# EAGLE board FlashLightLED (EAGLE 5.10)
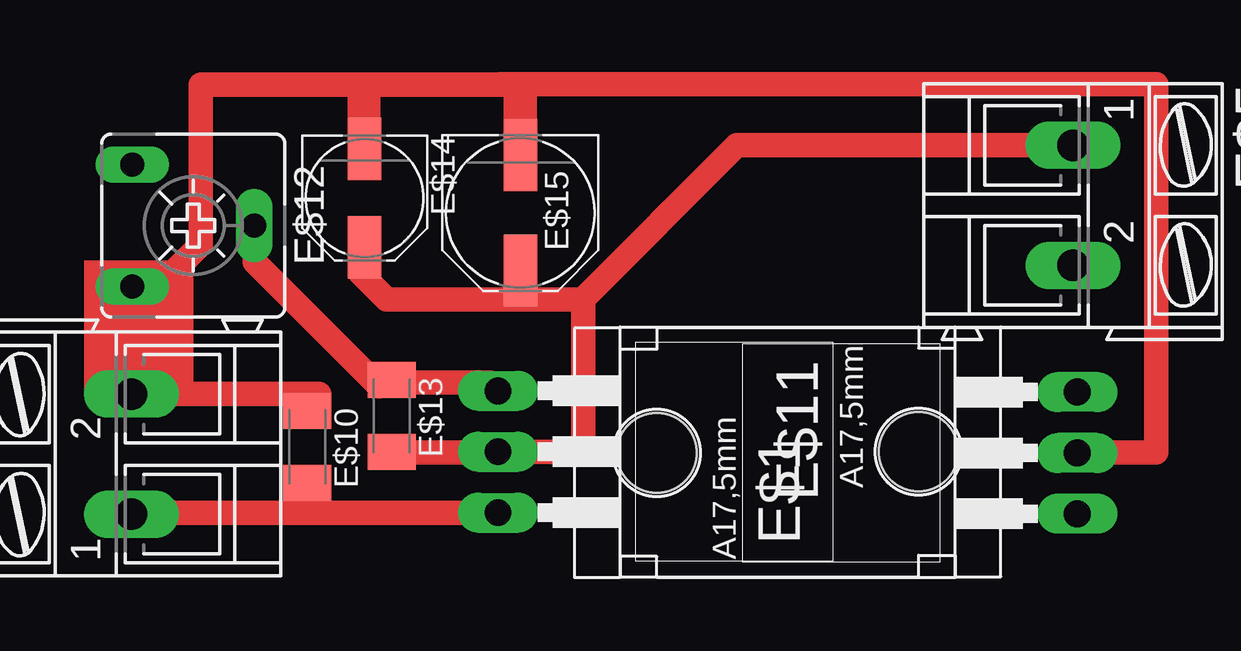
[diagram p0: board, top side]
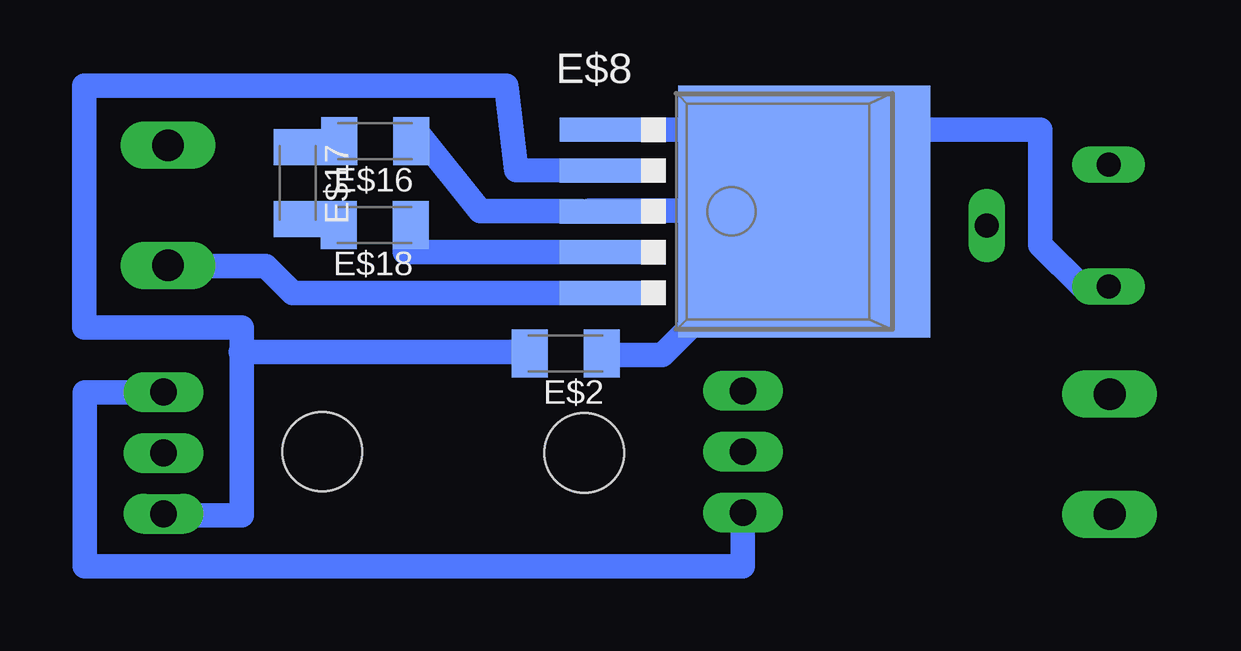
[diagram p1: board, bottom side, seen from below]

No outline drawn. Coordinates in mm, seen from the top.
Copper layers (1*16): Top 0.035mm / dielectric 1.5mm / Bottom 0.035mm
Design rules "default": minimum track width 10mil, minimum drill 24mil, track to track 8mil, track to pad 8mil, pad to pad 8mil, via to via 8mil, smd to smd 8mil, copper to edge 40mil, drill to drill 8mil, minimum pad ring 10mil, minimum via ring 8mil, stop-mask expansion 4mil, vias tented up to drill 0mil, thermal gap 10mil

## Footprints (pad centres in the part's own frame; a part is rotated, then mirrored left to right if it is on the bottom)
TO220 = drill 1.118 long: 1 -2.54,-6.35; 2 0,-6.35; 3 2.54,-6.35 | hole 3.302: 0,11.176
C1206K = smd 1.5 x 2: 1 -1.5,0; 2 1.5,0
AK300/2 = drill 1.321 long: 1 -2.515,0; 2 2.489,0
TO220-58 = smd 1 x 3.4: 1 -3.4,-5; 2 -1.7,-5; 3 0,-5; 4 1.7,-5; 5 3.4,-5 | smd 10.5 x 10.5: 6 0,3.5
CA6V = drill 1.016 long: A -2.54,-2.54; E 2.54,-2.54; S 0,2.54
PANASONIC_C = smd 2.6 x 1.4: + 2.05,0; - -2.05,0
PANASONIC_D = smd 3 x 1.4: + 2.4,0; - -2.4,0

## Placement (x,y rotation side)
E$1  [TO220]  36.39,5.7 90 top
E$2  [C1206K]  25.99,9.85 180 bottom
E$5  [AK300/2]  42.56,16.01 270 top
E$8  [TO220-58]  19.54,15.77 270 bottom
E$9  [AK300/2]  3.32,5.66 90 top
E$10  [C1206K]  10.66,5.96 270 top
E$11  [TO220]  24.95,5.75 270 top
E$12  [CA6V]  5.9,15.18 270 top
E$13  [C1206K]  14.18,7.24 270 top
E$14  [PANASONIC_C]  13.04,16.33 270 top
E$15  [PANASONIC_D]  19.53,15.71 270 top
E$16  [C1206K]  33.93,18.7 180 bottom
E$17  [C1206K]  37.14,16.96 270 bottom
E$18  [C1206K]  33.95,15.21 180 bottom

## Library data of the parts
E$1 E$11 = ref-packages
E$2 E$10 E$13 E$16-E$18 = resistor
E$5 E$9 = con-ptr500
E$8 = micro-siemens
E$12 = pot
E$14 E$15 = rcl

## Tracks (layer width: path | path; a pad name or v marks a point on that pad's centre or on a via)
S$1
  Bottom 1.016: 24.55,9.79 21.96,9.79 20.84,10.91
S$2
  Bottom 1.016: 27.53,9.91 39.53,9.91
S$10
  Top 1.016: 3.27,3.2 18.65,3.2
S$11
  Top 1.016: 3.36,8.16 11.15,8.16 11.15,7.61
S$12
  Top 1.016: 3.21,8.16 3.37,8.16 3.37,12.68
S$13
  Top 1.016: 14.59,5.72 18.61,5.72
S$14
  Top 1.016: 18.59,8.3 18.26,8.63 13.86,8.63
S$15
  Top 1.016: 8.46,15.21 8.46,13.66 13.64,8.48
S$16
  Top 1.016: 18.57,5.75 22.16,5.75 22.16,12.09 13.97,12.09 12.86,13.2
S$17
  Top 1.016: 4.95,13.12 6.21,14.38 6.21,21.06 19.72,21.06
S$18
  Bottom 1.016: 42.81,8.22 46.03,8.22 46.03,0.97 18.6,0.97 18.6,3.24
S$19
  Top 1.016: 42.83,5.72 46.02,5.72 46.02,21.07 18.7,21.07
S$20
  Bottom 1.016: 3.32,12.63 4.47,12.63 6.21,14.37 6.21,19.19 24.47,19.19
S$21
  Bottom 1.016: 25,15.8 20.41,15.8
S$22
  Bottom 1.016: 42.73,3.09 39.48,3.09 39.48,10.92 46.04,10.92 46.04,21.01 28.47,21.01 28.05,17.5 24.63,17.47
S$23
  Bottom 1.016: 25.34,15.78 29.54,15.78 32.15,19.03
S$24
  Bottom 1.016: 25.4,14.07 32.69,14.07 32.69,14.83
S$25
  Bottom 1.016: 24.46,12.37 37.36,12.37 38.48,13.49 42.68,13.49
S$26
  Top 1.016: 42.61,18.53 28.55,18.53 22.04,12.02
(copper drawn outside any net)
  shapes: Top area x3